# Altium PCB KIT_STM32F103C8T6.PcbDoc
Units mil, origin at the board's own origin, x right, y up, seen from the top; angles counter-clockwise.
Board outline 2000 x 3240 mil, 2 copper layers (Top Layer, Bottom Layer), stack 65.792 mil thick; 52 components, 60 nets, 256 pads, 62 vias.
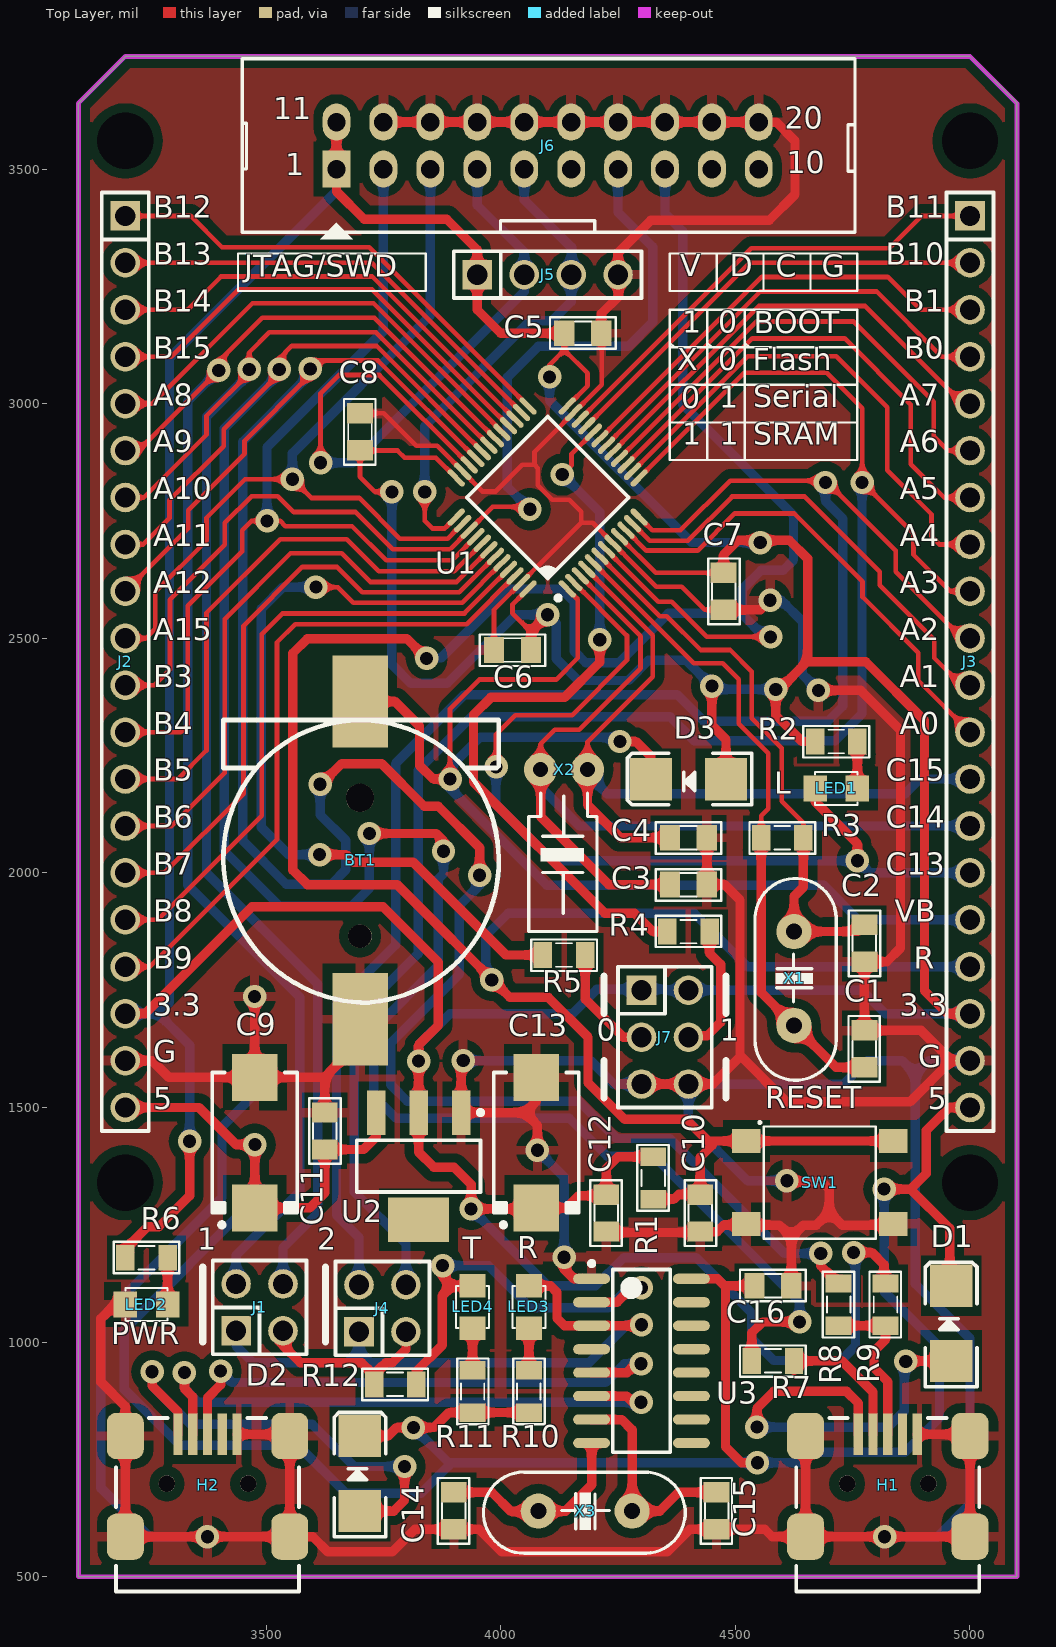
[diagram p0: Top Layer view]
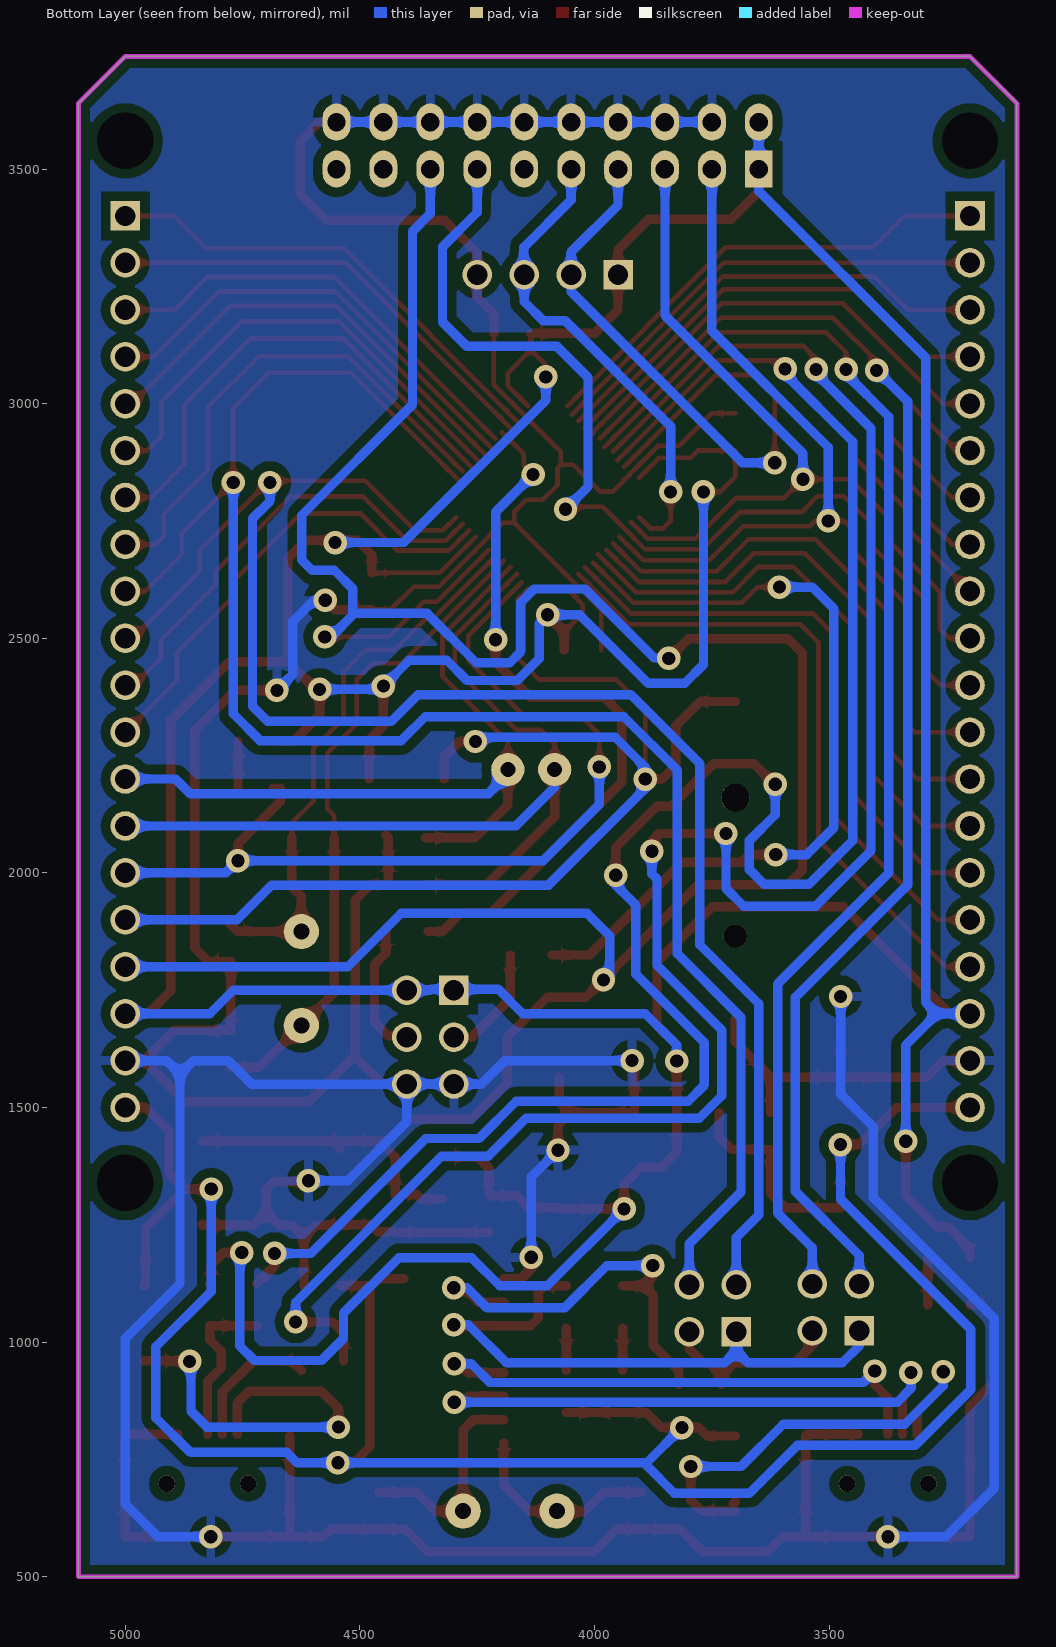
[diagram p1: Bottom Layer view, seen from below]
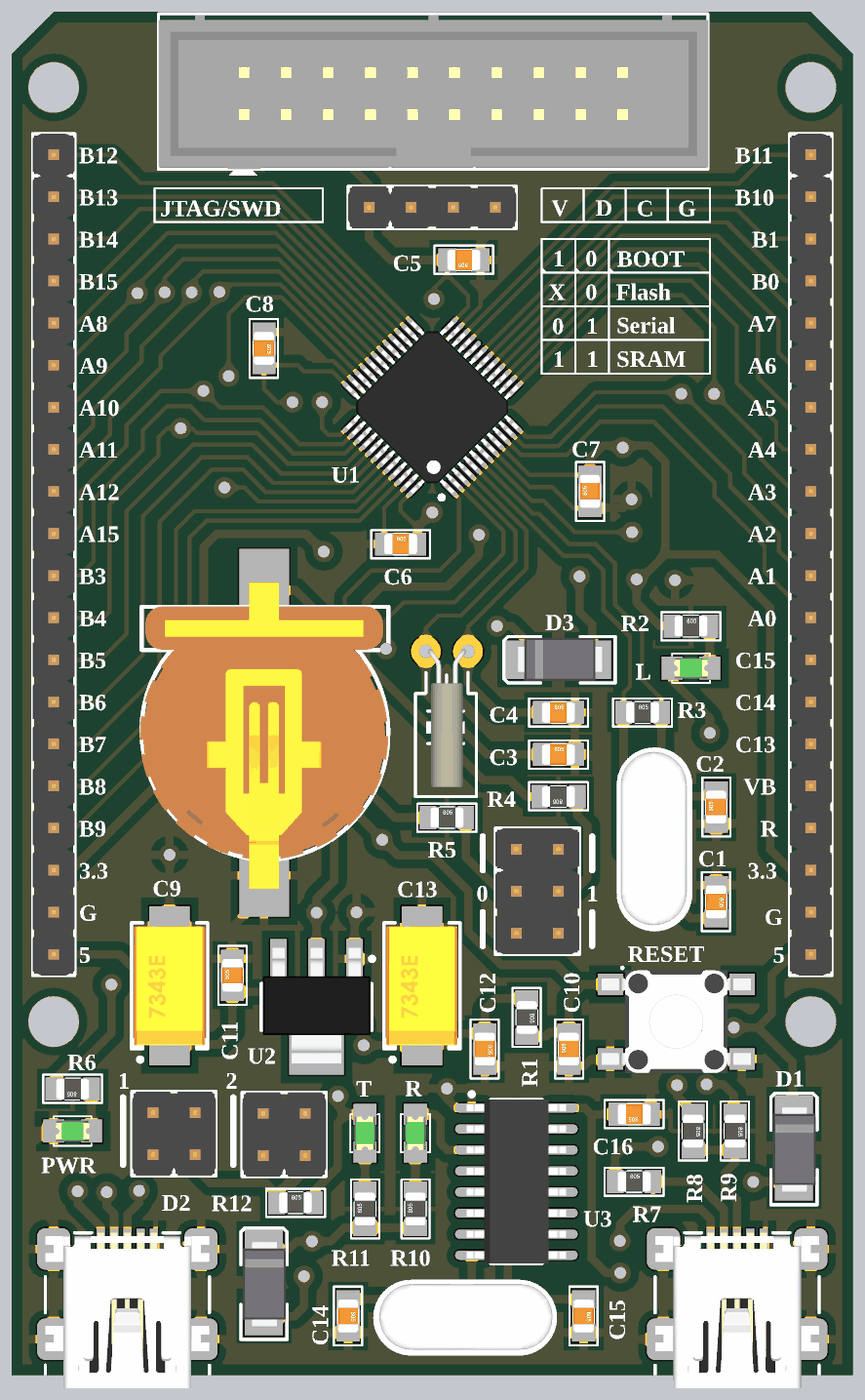
[diagram p2: 3D render of the assembled board from above, using the file's embedded part models]

## Layer stack, top to bottom
Top Solder: solder mask 0.4, Solder Resist, Dk 3.5
Top Layer: signal copper 1.4
Dielectric 1: dielectric 62.9921, FR-4, Dk 4.8
Bottom Layer: signal copper 1.4
Bottom Solder: solder mask 0.4, Solder Resist, Dk 3.5

## Board outline
3100,500 5100,500 5100,3640 5000,3740 3200,3740 3100,3640

## Design rules (kind name [scope] priority, off if disabled: settings)
Clearance Clearance_4 [InNamedPolygon('Bottom Layer-GND')] p1: gap=20 ignorepadtopadclearanceinfootprint=FALSE except(0: Arc-Hole Track-Hole SMDPad-Hole THPad-Hole Via-Hole Fill-Hole Poly-Hole Region-Hole Text-Hole)
Clearance Clearance_3 [InNamedPolygon('Top Layer-GND')] p2: gap=20 ignorepadtopadclearanceinfootprint=FALSE except(0: Arc-Hole Track-Hole SMDPad-Hole THPad-Hole Via-Hole Fill-Hole Poly-Hole Region-Hole Text-Hole)
Clearance Clearance_2 [InNamedPolygon('Bottom Layer-GND')] p3: gap=25 ignorepadtopadclearanceinfootprint=FALSE except(0: Arc-Hole Track-Hole SMDPad-Hole THPad-Hole Via-Hole Fill-Hole Poly-Hole Region-Hole Text-Hole)
Clearance Clearance_1 [InNamedPolygon('Top Layer-GND')] p4: gap=25 ignorepadtopadclearanceinfootprint=FALSE except(0: Arc-Hole Track-Hole SMDPad-Hole THPad-Hole Via-Hole Fill-Hole Poly-Hole Region-Hole Text-Hole)
Clearance [All] p5: gap=5 ignorepadtopadclearanceinfootprint=FALSE except(0: Arc-Hole Track-Hole SMDPad-Hole THPad-Hole Via-Hole Fill-Hole Poly-Hole Region-Hole Text-Hole)
PolygonConnect PolygonConnect_3 [All vs IsNamedPolygon('Top Layer-GND')] p1: connectstyle=Relief reliefconductorwidth=20 reliefentries=4 polygonreliefangle="90 Angle" airgapwidth=20
PolygonConnect PolygonConnect_2 [All vs IsNamedPolygon('Bottom Layer-GND')] p2: connectstyle=Relief reliefconductorwidth=20 reliefentries=4 polygonreliefangle="90 Angle" airgapwidth=20
PolygonConnect PolygonConnect_1 [All vs IsNamedPolygon('Top Layer-GND')] p3: connectstyle=Relief reliefconductorwidth=20 reliefentries=4 polygonreliefangle="90 Angle" airgapwidth=20
PolygonConnect [All] p4: connectstyle=Relief reliefconductorwidth=10 reliefentries=4 polygonreliefangle="90 Angle" airgapwidth=10
RoutingVias [All] p1: holewidth=28 width=50 viastyle="Through Hole" minholewidth=28 minwidth=50 maxholewidth=28 maxwidth=50
SolderMaskExpansion [All] p1: expansion=4 istentingtop=FALSE
Width [All] p1: maxlimit=50 minlimit=10 preferedwidth=20
30 further rules are at their usual default settings.

## Components (designator, comment, footprint, x,y, rotation, side; value= is the part's Value field where it differs from the comment)
BT1 "CR1220" "PIN CR1220" 3700,2055 r180 top locked
C1 "22pF" CN-SMD-0805 4775,1625 r270 top
C2 "22pF" CN-SMD-0805 4775,1850 r90 top
C3 "15pF" CN-SMD-0805 4400,1975 r0 top
C4 "15pF" CN-SMD-0805 4400,2075 r0 top
C5 "100nF" CN-SMD-0805 4175,3150 r180 top
C6 "100nF" CN-SMD-0805 4025,2475 r0 top
C7 "100nF" CN-SMD-0805 4475,2600 r90 top
C8 "100nF" CN-SMD-0805 3700,2940 r270 top
C9 "100uF" "TU TANTALUM" 3475,1425 r90 top
C10 "1uF" CN-SMD-0805 4425,1275 r90 top
C11 "100nF" CN-SMD-0805 3625,1450 r90 top
C12 "100nF" CN-SMD-0805 4225,1275 r270 top
C13 "100uF" "TU TANTALUM" 4075,1425 r90 top locked
C14 "22pF" CN-SMD-0805 3899.99,640.64 r270 top
C15 "22pF" CN-SMD-0805 4459.99,640.64 r270 top
C16 "100nF" CN-SMD-0805 4580,1120 r180 top
D1 "T4" DIO-SMD-106 4960,1040 r270 top
D2 "T4" DIO-SMD-106 3700,720 r270 top
D3 "T4" DIO-SMD-106 4400,2200 r0 top
H1 "SLAVE" "MINI USB" 4825,653.62 r180 top locked
H2 "SERIAL" "MINI USB" 3375.39,653.62 r180 top locked
J1 "UART1_EN" JP2-D2T 3486,1074 r0 top
J2 "JP20" JP20-D1T 3200,3400 r270 top locked
J3 "JP20" JP20-D1T 5000,3400 r270 top locked
J4 "UART2_EN" JP2-D2T 3748,1072 r0 top
J5 "JP4" JP4-D1T 3950,3275 r0 top locked
J6 "IDE10x2" IDC20 3650,3500 r0 top locked
J7 "JP3x2" JP3-D2T 4350,1650 r270 top
LED1 "L" LED-0805-Green 4760,2180 r180 top
LED2 "PWR" LED-0805-Green 3290,1080 r180 top
LED3 "R" LED-0805-Green 4060,1030 r90 top
LED4 "T" LED-0805-Green 3940,1030 r90 top
R1 "10k" RES-SMD-0805 4325,1350 r270 top
R2 "510R" RES-SMD-0805 4715,2280 r0 top
R3 "1M" RES-SMD-0805 4600,2075 r0 top
R4 "10k" RES-SMD-0805 4400,1875 r180 top
R5 "10k" RES-SMD-0805 4135,1825 r0 top
R6 "510R" RES-SMD-0805 3245,1180 r180 top
R7 "22R" RES-SMD-0805 4580,960 r0 top
R8 "22R" RES-SMD-0805 4720,1080 r270 top
R9 "1k5" RES-SMD-0805 4820,1080 r270 top
R10 "1k5" RES-SMD-0805 4060,895 r90 top
R11 "1k5" RES-SMD-0805 3940,895 r90 top
R12 "1k5" RES-SMD-0805 3775,910 r0 top
SW1 "RESET" SW2-SMD 4680,1340 r0 top locked
U1 "STM32F103C8T6" LQFP48 4100,2800 r135 top locked
U2 "LM1117-3.3V" SOT223 3825,1375 r180 top locked
U3 "CH340G" SO16 4300,960 r0 top locked
X1 "8MHz" XT2 4625,1775 r270 top
X2 "32.768kHz" XT32k 4185,2220 r270 top locked
X3 "12Mhz" XT2 4180,640 r180 top

## Footprints (in the part's own frame and the unit in brackets; to place one, negate y for a bottom-side part, rotate by r counter-clockwise, add the part's x,y. Pads: shape width x height; smd on the part's side, far side on the other; paste and mask are expansions set on the pad)
CN-SMD-0805 [mil]
  rect 43.31x55 smd: 1(-39.36,0.01) 2(39.37,0.01)
  silkscreen extent -70,-34 70,33, body extent -39,-25 39,25, height 31
DIO-SMD-106 [mil]
  rect 90x90.55 smd: 1(80,0) 2(-80,0)
  silkscreen extent -130,-55 135,55, body extent -99,-50 106,52, height 95
IDC20 [mm] "Header 10x2,20 pin, connecter"
  rect 1.5x2 hole 1: 1(0,0)
  oval 1.5x2 hole 1: 2(2.54,0) 3(5.08,0) 4(7.62,0) 5(10.16,0) 6(12.7,0) 7(15.24,0) 8(17.78,0) 9(20.32,0) 10(22.86,0) 11(0,2.54) 12(2.54,2.54) 13(5.08,2.54) 14(7.62,2.54) 15(10.16,2.54) 16(12.7,2.54) 17(15.24,2.54) 18(17.78,2.54) 19(20.32,2.54) 20(22.86,2.54)
  silkscreen extent -5.1,-3.81 28.07,5.97, body extent -5.09,-3.41 28.11,5.89, height 9.1
JP2-D2T [mm] "4 pins, dual pin, straight, gold plating"
  rect 1.6x1.6 hole 1.1: 1(-1.27,-1.27)
  round 1.6 hole 1.1: 2(1.27,-1.27) 3(1.27,1.27) 4(-1.27,1.27)
  silkscreen extent -2.54,-2.54 2.54,2.54, body extent -2.54,-2.54 2.54,2.54, height 8.55
JP3-D2T [mm] "6 pins, dual pin, straight, gold plating"
  rect 1.6x1.6 hole 1.1: 1(-2.54,-1.27)
  round 1.6 hole 1.1: 2(0,-1.27) 3(2.54,-1.27) 4(2.54,1.27) 5(0,1.27) 6(-2.54,1.27)
  silkscreen extent -3.81,-2.54 3.81,2.54, body extent -3.81,-2.54 3.81,2.54, height 8.55
JP4-D1T [mm] "4 pins, 1 row, straight, gold plating"
  rect 1.6x1.6 hole 1.1: 1(0,0)
  round 1.6 hole 1.1: 2(2.54,0) 3(5.08,0) 4(7.62,0)
  silkscreen extent -1.27,-1.27 8.89,1.27, body extent -1.27,-1.27 8.89,1.27, height 8.54
JP20-D1T [mm] "20 pins, 1 row, straight, gold plating"
  rect 1.6x1.6 hole 1.1: 1(0,0)
  round 1.6 hole 1.1: 2(2.54,0) 3(5.08,0) 4(7.62,0) 5(10.16,0) 6(12.7,0) 7(15.24,0) 8(17.78,0) 9(20.32,0) 10(22.86,0) 11(25.4,0) 12(27.94,0) 13(30.48,0) 14(33.02,0) 15(35.56,0) 16(38.1,0) 17(40.64,0) 18(43.18,0) 19(45.72,0) 20(48.26,0)
  silkscreen extent -1.27,-1.27 49.53,1.27, body extent -1.27,-1.27 49.53,1.27, height 8.54
LED-0805-Green [mil]
  rect 50x55 smd: 1(0,0) 2(90,0)
  silkscreen extent 0,-35 90,35, body extent 5,-25 85,25, height 43
LQFP48 [mm] "LQFP, 48-Leads, Body 7.00x7.00mm, Pitch 0.50mm, IPC Medium Density"
  oval 1.2x0.3 smd: 1(-4.25,2.75) 2(-4.25,2.25) 3(-4.25,1.75) 4(-4.25,1.25) 5(-4.25,0.75) 6(-4.25,0.25) 7(-4.25,-0.25) 8(-4.25,-0.75) 9(-4.25,-1.25) 10(-4.25,-1.75) 11(-4.25,-2.25) 12(-4.25,-2.75) 25(4.25,-2.75) 26(4.25,-2.25) 27(4.25,-1.75) 28(4.25,-1.25) 29(4.25,-0.75) 30(4.25,-0.25) 31(4.25,0.25) 32(4.25,0.75) 33(4.25,1.25) 34(4.25,1.75) 35(4.25,2.25) 36(4.25,2.75)
  oval 0.3x1.2 smd: 13(-2.75,-4.25) 14(-2.25,-4.25) 15(-1.75,-4.25) 16(-1.25,-4.25) 17(-0.75,-4.25) 18(-0.25,-4.25) 19(0.25,-4.25) 20(0.75,-4.25) 21(1.25,-4.25) 22(1.75,-4.25) 23(2.25,-4.25) 24(2.75,-4.25) 37(2.75,4.25) 38(2.25,4.25) 39(1.75,4.25) 40(1.25,4.25) 41(0.75,4.25) 42(0.25,4.25) 43(-0.25,4.25) 44(-0.75,4.25) 45(-1.25,4.25) 46(-1.75,4.25) 47(-2.25,4.25) 48(-2.75,4.25)
  silkscreen extent -4.37,-3.1 3.1,3.57, body extent -4.51,-4.51 4.51,4.51, height 1.55
"MINI USB" [mm]
  rect 0.5x2.25 smd: 1(1.605,-3.813) 2(0.805,-3.813) 3(0.005,-3.813) 4(-0.795,-3.813) 5(-1.595,-3.813)
  round 0.9 hole 0.9 unplated: M(-2.195,-1.138) M(2.205,-1.138)
  rrect50% 2x2.5 smd: S(-4.445,1.732) S(-4.445,-3.718) S(4.455,1.732) S(4.455,-3.718)
  silkscreen extent -4.95,-4.69 4.96,4.7, body extent -4.95,-4.69 4.96,4.71, height 4.01
"PIN CR1220" [mil]
  round 50 hole 50: 0(0,190)
  round 60 hole 60: 0(0,-105)
  rect 118.11x196.85 smd: 1(-0.28,-310.2) 2(-0.28,366.97)
  silkscreen extent -296,-271 291,332, body extent -295,-329 295,399, height 159
RES-SMD-0805 [mil]
  rect 39.37x55 smd: 1(-45,0) 2(45,0)
  silkscreen extent -70,-34 70,33, body extent -39,-25 39,25, height 31
SO16 [mm] "SOIC, 16-Leads, Body 9.90x3.91mm, Pitch 1.27mm, IPC Medium Density"
  oval 2x0.55 smd: 1(-2.7,4.445) 2(-2.7,3.175) 3(-2.7,1.905) 4(-2.7,0.635) 5(-2.7,-0.635) 6(-2.7,-1.905) 7(-2.7,-3.175) 8(-2.7,-4.445) 9(2.7,-4.445) 10(2.7,-3.175) 11(2.7,-1.905) 12(2.7,-0.635) 13(2.7,0.635) 14(2.7,1.905) 15(2.7,3.175) 16(2.7,4.445)
  silkscreen extent -2.82,-4.95 1.55,5.39, body extent -3,-4.95 3,4.95, height 1.4
SOT223 [mm]
  rect 1x2.4 smd: 1(-2.3,-2.9) 2(0,-2.9) 3(2.3,-2.9)
  rect 3.3x2.4 smd: 4(0,2.9)
  silkscreen extent -3.48,-3.02 3.35,1.4, body extent -3.25,-3.56 3.25,3.4, height 1.68
SW2-SMD [mm] "6*6mm vertical type, SMD, height 5.0mm, black actuator, 160gf, T&R"
  rect 1.55x1.3 smd: 1(-3.975,2.25) 2(-3.975,-2.25) 3(3.975,-2.25) 4(3.975,2.25)
  silkscreen extent -3.29,-3.04 3.04,3.29, body extent -4.5,-3.1 4.5,3.1, height 4.99
"TU TANTALUM" [mm]
  rect 2.55x2.45 smd: 1(-3.529,-0.014) 2(3.537,-0.014)
  silkscreen extent -4.57,-2.31 3.8,2.29, body extent -3.65,-2.16 3.65,2.14, height 4.1
XT2 [mil] "Footpin for Crystal 2 pin"
  round 75 hole 34: 1(-100,0) 2(100,0)
  silkscreen extent -213,-83 217,90, body extent -216,-87 216,90, height 144
XT32k [mm]
  round 1.8 hole 0.813: 1(0,0) 2(0,-2.54)
  silkscreen extent 1.27,-3.17 8.76,0.51, body extent -0.15,-2.42 8.2,-0.12, height 1.95

## Part data
BT1: library part "PIN CR1220"
C1 C2 C3 C4 C5 C6 C7 C8 C10 C11 C12 C14 C15 C16: library part CN
C9 C13: library part "CAP TANTALUM"
D1 D2 D3: library part "Diode SMD", "Default Diode"
H1 H2: library part "MINI USB"
J1 J4: library part JP2x2, "WR-PHD 2.54 mm Dual Socket Header"
J2 J3 J5: "WR-PHD 2.54 mm Angled Socket Header"
J6: library part "IDC 10X2", "IDC 10x2"
J7: "WR-PHD 2.54 mm Dual Socket Header"
LED1 LED2 LED3 LED4: library part "LED SMD"
R1 R2 R3 R4 R5 R6 R7 R8 R9 R10 R11 R12: library part Res-SMD, "Resistor"
SW1: library part SW4, "Switch button 4 pin"
U2: library part LM1117, "800mA Low-Dropout Linear Regulator"
U3: "High and Low Side Driver"
X1 X2 X3: library part XT2, "Crystal, 32.768 KHz, -40 to 85 degC, 3.2 x 1.5 x 0.9 mm SMD"

## Free pads (board coordinates)
  round 60 hole 120: ""(3200,1340) ""(3200,3560) ""(5000,1340) ""(5000,3560)

## Via types
v1: diameter 50, hole 28, Top Layer to Bottom Layer, tented both sides, 62 vias

## Nets (pads, with @x,y where several pads share a name; then routed paths per layer and width w, separated by ;. In a path a pad name is that pad's centre, name@x,y a point inside that pad or via, vN(x,y) a via of type N, cw(c..) or ccw(c..) an arc to the next point about the centre after c; other vN are vias at no path point)
3V3: C5.2 C6.2 C7.2 C8.2 C12.1 C13.1 D3.1 J2.18 J3.18 J5.1 J6.1 J6.11 J7.1 J7.6 R1.1 R2.1 R6.2 R9.1 U1.9 U1.24 U1.36 U1.48 U2.2 | length 13153.7
  Top Layer w10: v1(3768,2812) 3732,2812 3700.01,2843.99 C8.2 3700.63,2900 3780,2900 3795,2885 3861.89,2885 U1.36 ; U1.48 4025,2571.89 4025,2553.75 4064.37,2514.37 ; v1(4104,3057) 4104,3082.75 4135.63,3114.37 ; C5.2 4135.63,3114.37 ; U1.24 4185,3038.11 4185,3065 4135.63,3114.37 ; U1.9 4330.22,2639.37 C7.2
  Top Layer w20: R6.2 3200,1199 3247,1246 3271,1246 3337,1312 v1(3337,1428) ; J2.18 3242,1700 3470,1928 3749,1928 3867,1810 3867,1675 3825,1633 v1(3825,1599) U2.2 3825,1405 3857.5,1372.5 3900.5,1372.5 3937,1336 v1(3937,1284) 4073.51,1284 C13.1 4140.06,1286.06 4166,1312 4222.64,1312 C12.1 4225.01,1370.01 4250,1395 R1.1 ; J6.11 J6.1 3650,3452 3709,3393 3885,3393 3950,3328 J5.1 3950,3200 4000.01,3149.99 C5.2 ; C6.2 4064.37,2514.37 v1(4100,2550) ; v1(4450,2398) 4450,2314 4480,2284 D3.1 ; C7.2 4474.99,2677.99 4506,2709 4615,2709 4654,2670 4654,2451 ; R2.1 4642,2280 4586,2336 v1(4586,2391) 4594,2391 4654,2451 ; v1(4752,1191) 4791,1191 4817,1165 4817,1128 R9.1 ; J3.18 4952,1700 4903,1749 4903,2325 4778,2450 4655,2450 4654,2451
  Bottom Layer w20: J2.18 3270,1700 ; v1(3337,1428) 3337,1633 3270,1700 ; J6.11 J6.1 3650,3453 3294,3097 3294,1724 3270,1700 ; v1(3768,2812) 3768,2444 3808,2404 3886,2404 4032,2550 v1(4100,2550) 4118,2532 4118,2457 4165,2410 4272,2410 4315,2453 4395,2453 v1(4450,2398) ; v1(3825,1599) 3825,1633 3892,1700 4153,1700 4205,1752 4348,1752 4350,1750 J7.6 4770,1750 4820,1700 J3.18 ; v1(3937,1284) 4101,1120 4202,1120 4262,1180 4417,1180 4535,1062 4535,1008 4582,961 4725,961 4756,992 v1@4756,1179 ; v1(4104,3057) 4104,3007 4407,2704 v1(4553,2704) ; v1@4450,2391 v1(4586,2391)
5V: C9.1 C11.1 C16.2 D1.2 D2.2 J2.20 J3.20 R10.1 R11.1 U2.3 U3.16 | length 5545.4
  Top Layer w20: J2.20 3357,1500 3436,1421 v1(3476,1421) 3476,1295.62 3471,1290.62 C9.1 3593.05,1286.06 3624.99,1317.99 C11.1 3707.64,1410.64 3734.45,1437.45 U2.3 ; D2.2 3760,800 3778,818 v1(3814,818) 3858,818 3890,850 R11.1 R10.1 ; U3.16 4461.99,1135 4479,1117.99 4479,777 4513,743 v1(4547,743) ; 4481.01,1119.99 C16.2 ; v1(4817,1326) 4871,1326 ; D1.2 4957,1123 4957,1242.5 4873.5,1326 4907,1359.5 4907,1451 4956,1500 J3.20
  Bottom Layer w20: v1(3476,1421) 3476,1305 3198,1027 3198,899 3317,780 3568,780 3670,678 3830,678 3889,737 3889,740 ; v1(3814,818) 3889,743 3889,740 ; v1(4817,1326) 4817,1108 4935,990 4935,839 4861,765 4656,765 4634,743 v1(4547,743) 3892,743 3889,740
BOOT0: J7.2 R5.2 | length 247.6
  Top Layer w20: R5.2 4180,1731 4261,1650 J7.2
BOOT1: J7.5 R4.1 | length 268
  Top Layer w20: J7.5@4416,1653 4440,1653 4469,1682 4469,1805 4445,1829 R4.1
GND: BT1.2 C1.1 C2.1 C3.2 C4.2 C5.1 C6.1 C7.1 C8.1 C9.2 C10.1 C11.2 C12.2 C13.2 C14.2 C15.2 C16.1 H1.5 H1.S H2.5 H2.S J2.19 J3.19 J5.4 J6.12 J6.13 J6.14 J6.15 J6.16 J6.17 J6.18 J6.19 J6.20 J7.3 J7.4 LED2.2 SW1.2 SW1.3 U1.8 U1.23 U1.35 U1.47 U2.1 U3.1 | length 16829
  Top Layer w10: C8.1 3750.64,2979.36 3820,2910 3864.73,2910 U1.35 ; U1.35@3924.33,2851.5 3924.33,2849.3 3960.62,2813 3989,2813 4045.64,2869.64 4072.12,2869.64 ; C6.1 3985.64,2560.36 4171.38,2746.1 4171.48,2746 ; C5.1 4215,3149.36 4215,3040.27 4072.12,2897.4 4072.12,2869.64 ; C7.1 4435,2560.64 4385.64,2610 4331.76,2610 4195.76,2746 4171.48,2746 ; 4072.12,2869.64 4079,2862.76 4079,2826 4110,2795 4145.72,2795 4171.48,2769.24 4171.48,2746
  Top Layer w20: LED2.2 3178,1080 3148,1050 3148,915 3200,863 3200,800 3200,585.43 v1(3375,585.43) H2.S@3550.39,585.43 ; J2.19 3257,1600 3292.76,1564.24 C9.2 ; H2.5 3546.65,803.74 3550.39,800 H2.S@3550.39,585.43 ; v1(3475.57,1736.57) C9.2 ; C11.2 3624.99,1564.99 ; BT1.2 3700.28,1640.28 3624.99,1564.99 ; J6.12 J6.13 J6.14 J6.15 J6.16 J6.17 J6.18 J6.19 J6.20 4587,3600 4627,3560 4627,3446 4572,3391 4320,3391 4250,3321 J5.4 ; v1@3915.55,1586.89 U2.1 4051.17,1489.17 ; C13.2 4075.57,1513.57 4051.17,1489.17 ; v1(4078,1409) 4078,1462.35 4051.17,1489.17 ; v1@4134,1157 4156,1135 U3.1 ; C5.1 4214.36,3191.36 4251,3228 J5.4@4251,3274 ; C12.2 4226.91,1233.72 4423.08,1233.72 C10.1 4461.64,1235.64 4476.08,1250.08 4524.84,1250.08 4525.42,1249.5 4593.65,1249.5 4619.36,1223.78 ; J7.3@4325,1550 J7.4 4452,1550 4510,1608 ; C4.2@4445,2080.63 C4.2 C3.2 4476.99,1975.01 4510,1942 4510,1608 ; C7.1 4553.64,2560.64 v1(4574,2581) ; v1(4610,1344) 4611.92,1342.08 4683.92,1342.08 4700,1326 4700,1277 ; C16.1 4619.36,1223.78 ; H1.S@4649.61,800 H1.S@4649.61,585.43 ; v1(4677,2389) 4767,2389 4852,2304 4852,1840 4822.64,1810.64 C2.1 C1.1 ; C1.1 4895.64,1664.36 4960,1600 ; SW1.3 4834.58,1249.5 4727.5,1249.5 4700,1277 ; H1.5 4996.26,803.74 5000,800 5000,585.43 v1(4818,585.43) H1.S@4649.61,585.43 ; J3.19 4960,1600 ; C9.2 3624.24,1564.24 3624.99,1564.99 ; H2.S@3550.39,585.43 3599.57,585.43 3632,553 3769,553 3817.26,601.26 C14.2 3953.74,601.26 4002,553 4355,553 4403.26,601.26 C15.2 4562.74,601.26 4578.57,585.43 H1.S@4649.61,585.43 ; 4510,1608 4513,1608 4609,1512 4872,1512 4960,1600 ; 4619.36,1223.78 4645.08,1249.5 4672.5,1249.5 4700,1277
  Bottom Layer w20: v1(3375,585.43) 3251.57,585.43 3148,689 3148,1050 3406,1308 3406,1459 3477,1530 3475.57,1531.43 v1(3475.57,1736.57) ; J6.12 J6.13 J6.14 J6.15 J6.16 J6.17 J6.18 J6.19 J6.20 ; v1(3920,1600) 4191,1600 4241,1550 J7.3 J7.4 ; v1(4078,1409) 4135,1352 v1(4135,1181) ; v1@4574,2571 v1(4574,2581) 4598,2581 4643,2536 4643,2423 v1(4677,2389) ; v1(4610,1344) 4526,1344 4400,1470 J7.4 ; v1(4818,585.43) 4930.43,585.43 5000,655 5000,1008 4883.5,1124.5 4883.5,1571.5 ; J3.19 4912,1600 4883.5,1571.5 ; J7.4 4731,1550 4781,1600 4855,1600 4883.5,1571.5
NetC1_2: C1.2 R3.1 U1.5 X1.2 | length 1404.4
  Top Layer w10: U1.5@4193.26,2664.98 U1.5 4411.24,2447 4473,2447 4507,2413 4507,2318 4570,2255 4570,2137 4555,2122 R3.1
  Top Layer w20: R3.1 4555,1745 X1.2 4714.37,1585.63 C1.2
NetC2_2: C2.2 R3.2 U1.6 X1.1 | length 1195.1
  Top Layer w10: U1.6@4207.18,2678.9 U1.6 4339.08,2547 4354,2547 4426,2475 4489,2475 4535,2429 4535,2330 4599,2266 4599,2153 4645,2107 R3.2
  Top Layer w20: R3.2 4645,1970 4625,1950 X1.1 4760.62,1875 C2.2
NetC14_1: C14.1 U3.8 X3.2 | length 423.5
  Top Layer w20: C14.1 3981,680 4022,639 4079,639 X3.2 4138,640 4193.7,695.7 U3.8
NetC15_1: C15.1 U3.7 X3.1 | length 465
  Top Layer w20: U3.7 4258,835 4280,813 X3.1 4339,640 4379,680 C15.1
NetD1_1: D1.1 H1.1 | length 880.2
  Top Layer w20: v1(4546,819) 4546,859 4582,895 4737,895 4761.81,870.19 H1.1 ; v1(4863,959) 4864,960 D1.1
  Bottom Layer w20: v1(4546,819) 4826,819 4860,853 4860,956 v1(4863,959)
NetD2_1: D2.1 H2.1 | length 979
  Top Layer w20: v1(3257,937) 3257,907 3312.2,851.8 H2.1 ; D2.1 3772,640 3795,663 v1(3795,735) ; D2.1@3700,660 D2.1@3705,655
  Bottom Layer w20: v1(3257,937) 3257,907 3339,825 3598,825 3688,735 v1(3795,735)
NetH1_2: H1.2 R7.2 | length 299.9
  Top Layer w20: R7.2@4625,940 R7.2@4635,950 ; R7.2 4727,960 4793.31,893.69 H1.2
NetH1_3: H1.3 R8.2 R9.2 | length 353.6
  Top Layer w20: R8.2 R9.2 4820,1005 4795.4,980.4 4795.4,945.4 4824.8,916 H1.3
NetH2_2: H2.2 U3.6 | length 1268.3
  Top Layer w20: v1(3326,935) 3326,901 3343.7,883.3 H2.2 ; U3.6 4268,885 4281,872 v1(4299,872)
  Bottom Layer w20: v1(3326,935) 3326,901 3355,872 v1(4299,872)
NetH2_3: H2.3 U3.5 | length 1181.7
  Top Layer w20: H2.3 3375.2,881.2 3403,909 v1(3403,938.2) ; U3.5 4269,935 4288,954 v1(4299,954)
  Bottom Layer w20: v1(3403,938.2) 3427.2,914 4223,914 4263,954 v1(4299,954)
NetJ1_1: J1.1 J4.1 LED3.2 U3.3 | length 1335.6
  Top Layer w20: LED3.2 4106,1120 4120,1106 4120,1051 4136,1035 U3.3 4283,1035 4300,1052 v1(4300,1037)
  Bottom Layer w20: J1.1 3436,992 3472,956 3673,956 3698,981 ; J4.1 3698,981 ; v1(4300,1037) 4269,1037 4188,956 3723,956 3698,981
NetJ1_2: J1.2 J4.2 R12.1 | length 405.1
  Top Layer w20: J1.2 3536,993 3573,956 3704,956 R12.1@3730,930 ; R12.1 R12.1@3730,930 ; J4.2@3794,1018 J4.2 3798,985 3769,956 3755,956 3730,931 R12.1@3730,930
NetLED1_1: LED1.1 R2.2 | length 100
  Top Layer w20: LED1.1 R2.2
NetLED2_1: LED2.1 R6.1 | length 100
  Top Layer w20: LED2.1 R6.1
NetLED3_1: LED3.1 R10.2 | length 90
  Top Layer w20: R10.2 LED3.1
NetLED4_1: LED4.1 R11.2 | length 90
  Top Layer w20: R11.2 LED4.1
NetLED4_2: LED4.2 R12.2 U3.2 | length 935
  Top Layer w20: R12.2 3820,938 3875,993 3875,1099 3896,1120 ; v1(3876,1163) 3876,1140 3896,1120 ; LED4.2 3896,1120 ; U3.2 4248,1085 4279,1116 v1(4300,1116)
  Bottom Layer w20: v1(3876,1163) 3974,1163 4064,1073 4229,1073 4272,1116 v1(4300,1116)
NetR4_2: R4.2 U1.20 | length 1554.4
  Top Layer w10: v1(4131,2849) 4151,2869 4151,2892.76 U1.20
  Top Layer w20: v1(4211,2497) 4211,2449 4136,2374 3979,2374 3942,2337 3942,2194 4222,1914 4285,1914 4324,1875 R4.2
  Bottom Layer w20: v1(4131,2849) 4211,2769 v1(4211,2497)
NetR5_1: R5.1 U1.44 | length 1759.1
  Top Layer w10: v1(3606,2609) 3653,2609 3686,2576 3917.76,2576 U1.44
  Top Layer w20: v1(3614,2039) 3670,2039 3686,2023 3813,2023 4011,1825 R5.1
  Bottom Layer w20: v1(3606,2609) 3536,2609 3490,2563 3490,2097 3548,2039 v1(3614,2039)
NRST: C10.2 J3.17 J6.8 R1.2 SW1.1 SW1.4 U1.7 | length 6334.3
  Top Layer w10: U1.7 4335.92,2578 4364,2578 4439,2503 v1(4575,2503)
  Top Layer w20: v1(3842,2457) 3800,2499 3588,2499 3557,2468 3557,2006 3588,1975 3779,1975 4019,1735 4101,1735 4186,1650 4186,1553 4264,1475 4395,1475 4441.42,1428.58 ; R1.2 4370,1305 4380,1315 4424.37,1315 C10.2 4424.99,1393.99 4450.5,1419.5 4441.42,1428.58 ; SW1.1@4542.09,1415 SW1.1@4543.5,1413.58 ; SW1.4 SW1.1 4441.42,1428.58
  Bottom Layer w20: v1@3837,2458 3873,2458 4020,2605 4129,2605 4157,2577 4157,2472 4181,2448 4252,2448 4357,2553 4515,2553 4515,2605 4555,2645 4602,2645 4624,2667 4624,2762 4388,2998 4388,3367 4350,3405 J6.8 ; v1(3981,1772) 3968,1785 3968,1866 4016,1914 4412,1914 4526,1800 J3.17 ; 4515,2550 4562,2503 v1(4575,2503)
PA0: J3.12 U1.10 | length 1030
  Top Layer w10: U1.10 4310.44,2687 4420,2687 4499,2766 4625,2766 4771,2620 4771,2588 4890,2469 4890,2410 J3.12
PA1: J3.11 U1.11 | length 979.4
  Top Layer w10: U1.11 4317.27,2708 4399,2708 4493,2802 4648,2802 4808,2642 4808,2613 4924,2497 4924,2458 4982,2400 J3.11
PA2: J3.10 J4.4 U1.12 | length 3652.4
  Top Layer w10: U1.12 4323.11,2730 4383,2730 4489,2836 4693,2836 4842,2687 4842,2642 4984,2500 J3.10
  Bottom Layer w20: J4.4 3698,1223 3650,1271 3650,1721 3776,1847 3776,2233 3923,2380 4376,2380 4433,2323 4697,2323 4729,2355 4729,2755 4692,2792 v1(4692,2832)
PA3: J3.9 J4.3 U1.13 | length 3845.7
  Top Layer w10: U1.13@4290.7,2837.58 U1.13 4519.11,3066 4695,3066 4770.5,2990.5 4770.5,2832.5 4879.5,2723.5 4879.5,2678.5 4958,2600 J3.9
  Bottom Layer w20: J4.3 3798,1210 3688,1320 3688,1692 3824,1828 3824,2219 3938,2333 4361,2333 4412,2282 4713,2282 4770,2339 v1(4770,2832)
PA4: J3.8 U1.14 | length 1092.8
  Top Layer w10: U1.14 4526.27,3101 4715,3101 4824,2992 4824,2858 4918,2764 4918,2717 4935,2700 J3.8
PA5: J3.7 U1.15 | length 1065.3
  Top Layer w10: U1.15@4262.86,2865.42 4536.44,3139 4733,3139 4874,2998 4874,2871 4945,2800 J3.7
PA6: J3.6 U1.16 | length 1030.2
  Top Layer w10: U1.16@4248.94,2879.34 4544.6,3175 4752,3175 4923,3004 4923,2931 4954,2900 J3.6
PA7: J3.5 U1.17 | length 981.5
  Top Layer w10: U1.17@4235.02,2893.26 U1.17 4549.76,3208 4777,3208 4985,3000 J3.5
PA8: J2.5 U1.29 | length 1012.2
  Top Layer w10: J2.5 3257,3000 3471,3214 3728.86,3214 4002.01,2940.85 4002.01,2938.64 4005.64,2935.02 U1.29@4006.74,2935.02
PA9: J1.4 J2.6 U1.30 | length 3158.4
  Top Layer w10: J2.6 3228,2900 v1(3399,3071) ; v1@3399,3066 v1(3399,3071) ; U1.30 3730.92,3183 3492,3183 3399,3090 v1(3399,3071)
  Bottom Layer w20: v1(3399,3071) 3333,3005 3333,1974 3572,1735 3572,1321 3436,1185 J1.4
PA10: J1.3 J2.7 U1.31 | length 3190.8
  Top Layer w10: J2.7 3239,2800 3373,2934 3373,2974 3464,3065 v1(3464,3073) 3464,3109 3507,3152 3734.08,3152 U1.31 U1.31@3978.9,2907.18
  Bottom Layer w20: v1(3464,3073) 3464,3063 3373,2972 3373,2000 3610,1763 3610,1275 3536,1201 J1.3
PA11: J2.8 R7.1 U1.32 | length 4750
  Top Layer w10: J2.8 3238,2700 3294,2756 3294,2794 3409.5,2909.5 3409.5,2945.5 3528,3064 v1(3528,3073) 3528,3088 3524,3092 3555,3123 3735.24,3123 U1.32
  Top Layer w20: v1(3720,2084) 3720,2072 3732,2084 3862,2084 3878,2068 v1(3878,2046) ; R7.1 4535,1020 4558,1043 v1(4637,1043)
  Bottom Layer w20: v1(3528,3073) 3528,3064 3411,2947 3411,2047 3529,1929 3682,1929 3720,1967 v1(3720,2084) ; v1(3878,2046) 3878,1998 3867,1987 3867,1803 3729,1665 3729,1525 3777,1477 4146,1477 4227,1396 4326,1396 4637,1085 v1(4637,1043)
PA12: J2.9 R8.1 U1.33 | length 4795.1
  Top Layer w10: J2.9 3334,2734 3334,2773 3454,2893 3454,2921 3591,3058 3591,3077 3606,3092 3738.4,3092 U1.33 U1.33@3951.06,2879.34
  Top Layer w20: v1(3615,2189) 3617,2189 3661,2233 3746,2233 3837,2142 3867,2142 3955,2054 v1(3955,1995) ; v1(4682,1189) 4682,1163 R8.1
  Bottom Layer w20: v1(3594,3074) 3594,3063 3450,2919 3450,2069 3543,1976 3639,1976 3670,2007 3670,2069 3615,2124 v1(3615,2189) ; v1(3955,1995) 3955,1974 3912,1931 3912,1784 3766,1638 3766,1548.17 3800.61,1513.57 4167,1513.57 4246.57,1434 4360,1434 4605,1189 v1(4682,1189)
PA15/TDI: J2.10 J6.3 U1.38 | length 1789.1
  Top Layer w10: J2.10 3244,2500 3264,2520 3264,2599 3373,2708 3373,2757 3455,2839 v1(3556,2839) 3596,2799 3698,2799 3785,2712 3886.73,2712 U1.38 U1.38@3923.22,2748.5
  Bottom Layer w20: v1(3556,2839) 3556,2894 3850,3188 J6.3
PB0: J3.4 U1.18 | length 973.9
  Top Layer w10: U1.18@4221.1,2907.18 U1.18 4552.92,3239 4801,3239 4940,3100 J3.4
PB1: J3.3 U1.19 | length 960.4
  Top Layer w10: U1.19 4556.08,3270 4825,3270 4895,3200 J3.3
PB3/TDO: J2.11 J6.7 U1.39 | length 2248.1
  Top Layer w10: J2.11 3262,2400 3295,2433 3295,2582 3412,2699 3412,2746 3469,2803 3525,2803 3559,2769 3691,2769 3770,2690 3892.56,2690 U1.39 3982.56,2780 4060,2780 4060,2777 v1(4062,2775)
  Bottom Layer w20: v1(4062,2775) 4014,2823 4014,3056 4080,3122 4272,3122 4324,3174 4324,3334 4250,3408 J6.7
PB4/NTRST: J2.12 J6.2 U1.40 | length 2016.9
  Top Layer w10: J2.12 3318,2300 3333,2315 3333,2569 3449,2685 3449,2730 3469,2750 v1(3502,2750) 3530,2750 3541,2739 3683,2739 3756,2666 3896.4,2666 U1.40
  Bottom Layer w20: v1(3502,2750) 3502,2907 3750,3155 J6.2
PB5: J2.13 U1.41 | length 1196.9
  Top Layer w10: J2.13 3312,2200 3373,2261 3373,2554 3530,2711 3672,2711 3740,2643 3901.24,2643 U1.41
PB6: J2.14 U1.42 | length 1261.2
  Top Layer w10: J2.14 3299,2100 3412,2213 3412,2541 3552,2681 3661,2681 3722,2620 3906.08,2620 U1.42
PB7: J2.15 U1.43 | length 1328.5
  Top Layer w10: J2.15 3283,2000 3452,2169 3452,2527 3577,2652 3651,2652 3705,2598 3911.92,2598 U1.43 U1.43@3992.82,2678.9
PB8: J2.16 U1.45 | length 1358.5
  Top Layer w10: J2.16 3269,1900 3491,2122 3491,2509 3535,2553 3922.6,2553 U1.45@4020.66,2651.06
PB9: J2.17 U1.46 | length 1427.4
  Top Layer w10: J2.17 3252,1800 3523,2071 3523,2491 3562,2530 3927.44,2530 U1.46@4034.58,2637.14
PB10: J3.2 U1.21 | length 966.1
  Top Layer w10: U1.21@4179.34,2948.94 U1.21 4530.4,3300 J3.2
PB11: J3.1 U1.22 | length 1015.6
  Top Layer w10: U1.22@4165.42,2962.86 4533.56,3331 4828,3331 4897,3400 J3.1
PB12: J2.1 U1.25 | length 1026.1
  Top Layer w10: J2.1 3339,3400 3406,3333 3720.11,3333 U1.25
PB13: J2.2 U1.26 | length 982.4
  Top Layer w10: J2.2 3725.27,3300 U1.26 U1.26@4048.5,2976.78
PB14: J2.3 U1.27 | length 991.6
  Top Layer w10: J2.3 3333,3200 3404,3271 3726.44,3271 U1.27 U1.27@4034.58,2962.86
PB15: J2.4 U1.28 | length 1002.5
  Top Layer w10: J2.4 3298,3100 3442,3244 3725.6,3244 U1.28 U1.28@4020.66,2948.94
PC13: J3.15 LED1.2 U1.2 | length 1973.2
  Top Layer w10: v1(3990,2226) 3990,2295 4031,2336 4152,2336 4269,2453 4269,2505.73 U1.2
  Top Layer w20: LED1.2 4670,2152 4760,2062 v1(4760,2026) ; LED1.2@4685,2175 LED1.2@4685,2180
  Bottom Layer w20: v1(3990,2226) 3990,2146 4110,2026 v1(4760,2026) 4786,2000 J3.15
PC14: C3.1 J3.14 U1.3 X2.2 | length 1982.8
  Top Layer w10: X2.2@4085,2250 4085,2275 4115,2305 4167,2305 4298,2436 4298,2504.56 U1.3 U1.3@4165.42,2637.14
  Top Layer w20: X2.2 4085,2120 4229.99,1975.01 C3.1
  Bottom Layer w20: X2.2 4085,2183 4168,2100 J3.14
PC15: C4.1 J3.13 U1.4 X2.1 | length 1653
  Top Layer w10: U1.4@4179.34,2651.06 U1.4 4324,2506.4 4324,2418 4185,2279 X2.1@4185,2250
  Top Layer w20: X2.1 4185,2145 4255,2075 C4.1
  Bottom Layer w20: X2.1 4185,2210 4226,2169 4862,2169 4893,2200 J3.13
TCK/CLK: J5.3 J6.5 U1.37 | length 1032.8
  Top Layer w10: v1(3838,2812) 3838,2750 3854,2734 3880.89,2734 U1.37
  Bottom Layer w20: v1(3838,2812) 3838,2952 4063,3177 4110,3177 4150,3217 J5.3 4151,3276 4151,3333 4050,3434 J6.5
TMS/DIO: J5.2 J6.4 U1.34 | length 1453.9
  Top Layer w10: v1(3616,2874) 3616,3022 3655,3061 3741.56,3061 U1.34 U1.34@3937.14,2865.42
  Bottom Layer w20: v1(3616,2874) 3685,2874 4050,3239 J5.2 4050,3323 3950,3423 J6.4
VBAT: BT1.1 D3.2 J3.16 U1.1 | length 2720.9
  Top Layer w10: v1(3892,2200) 3892,2350 3954,2412 4118,2412 4164,2458 4164,2582.89 U1.1
  Top Layer w20: BT1.1 3774.8,2365.2 3827,2313 3827,2229 3856,2200 v1(3892,2200) ; v1(4254,2280) 4288,2280 4320,2248 D3.2
  Bottom Layer w20: v1(4254,2280) 4245,2289 3956,2289 3892,2225 v1(3892,2200) 3892,2180 4098,1974 4688,1974 4762,1900 J3.16
pads on no net: BT1.0 H1.4 H1.M H2.4 H2.M J6.6 J6.9 J6.10 U2.4 U3.4 U3.9 U3.10 U3.11 U3.12 U3.13 U3.14 U3.15

## Polygon pours and split planes (outlines as drawn)
GND on Top Layer "Top Layer-GND" (solid, remove dead copper, pour order 0): 3100,500 5100,500 5100,3640 5000,3740 3200,3740 3100,3640
GND on Bottom Layer "Bottom Layer-GND" (solid, remove dead copper, pour order 1): 3100,500 5100,500 5100,3640 5000,3740 3200,3740 3100,3640

## Keep-outs
Keep-Out Layer:
  the board outline again, w10

## Silkscreen, mask and mechanical layers (free items; w line width, h text height)
Top Overlay:
  lines w5: 4360,2960 4760,2960 ; 4360,3040 4760,3040 ; 4360,3120 4760,3120 ; 4360,3130 4370,3120 ; 4440,2880 4440,3200 ; 4440,3130 4450,3120 ; 4460,3240 4460,3320 ; 4520,2880 4520,3200 ; 4520,3130 4530,3120 ; 4560,3240 4560,3320 ; 4660,3240 4660,3320 ; 3440,3240 3440,3320 3840,3320 3840,3240 3440,3240 ; 4360,2880 4360,3200 4760,3200 4760,2880 4360,2880 ; 4360,3240 4760,3240 4760,3320 4360,3320 4360,3240
  lines w15: 3365,1000 3365,1160 ; 3627,1000 3627,1160 ; 4220,1520 4220,1600 ; 4220,1700 4220,1780 ; 4480,1520 4480,1600 ; 4480,1700 4480,1780
  text "B12" at 3260,3380 h80
  text "B11" at 4820,3380 h80
  text "B13" at 3260,3280 h80
  text "B10" at 4820,3280 h80
  text "V" at 4383,3255 h80
  text "D" at 4488,3255 h80
  text "JTAG/SWD" at 3453,3254 h80
  text "C" at 4586,3254 h80
  text "G" at 4684,3254 h80
  text "B14" at 3260,3180 h80
  text "B1" at 4860,3180 h80
  text "1" at 4387,3135 h80
  text "0" at 4464,3135 h80
  text "BOOT" at 4539,3134 h80
  text "B15" at 3260,3080 h80
  text "B0" at 4860,3080 h80
  text "X" at 4376,3055 h80
  text "0" at 4464,3055 h80
  text "Flash" at 4537,3055 h80
  text "A8" at 3260,2980 h80
  text "A7" at 4850,2980 h80
  text "Serial" at 4538,2976 h80
  text "1" at 4466,2975 h80
  text "0" at 4385,2974 h80
  text "1" at 4387,2896 h80
  text "1" at 4467,2896 h80
  text "SRAM" at 4538,2896 h80
  text "A9" at 3260,2880 h80
  text "A6" at 4850,2880 h80
  text "A10" at 3260,2780 h80
  text "A5" at 4850,2780 h80
  text "A11" at 3260,2680 h80
  text "A4" at 4850,2680 h80
  text "A12" at 3260,2580 h80
  text "A3" at 4850,2580 h80
  text "A15" at 3260,2480 h80
  text "A2" at 4850,2480 h80
  text "B3" at 3260,2380 h80
  text "A1" at 4850,2380 h80
  text "B4" at 3260,2280 h80
  text "A0" at 4850,2280 h80
  text "B5" at 3260,2180 h80
  text "C15" at 4820,2180 h80
  text "B6" at 3260,2080 h80
  text "C14" at 4820,2080 h80
  text "B7" at 3260,1980 h80
  text "C13" at 4820,1980 h80
  text "B8" at 3260,1880 h80
  text "VB" at 4840,1880 h80
  text "B9" at 3260,1780 h80
  text "R" at 4880,1780 h80
  text "3.3" at 3260,1680 h80
  text "3.3" at 4850,1680 h80
  text "0" at 4205,1626 h80
  text "1" at 4467,1626 h80
  text "G" at 3260,1580 h80
  text "G" at 4890,1570 h80
  text "5" at 3260,1480 h80
  text "5" at 4910,1480 h80
  text "1" at 3353,1181 h80
  text "2" at 3609,1181 h80

## Text inside footprints (layer, text, board x,y; h text height)
J6: Top Overlay "20" at 4605,3570 h80; Top Overlay "10" at 4610,3475 h80; Top Overlay "11" at 3515,3590 h80; Top Overlay "1" at 3540.75,3470.47 h80